# EAGLE board xr_vco_pots_V2 (EAGLE 7.3.0)
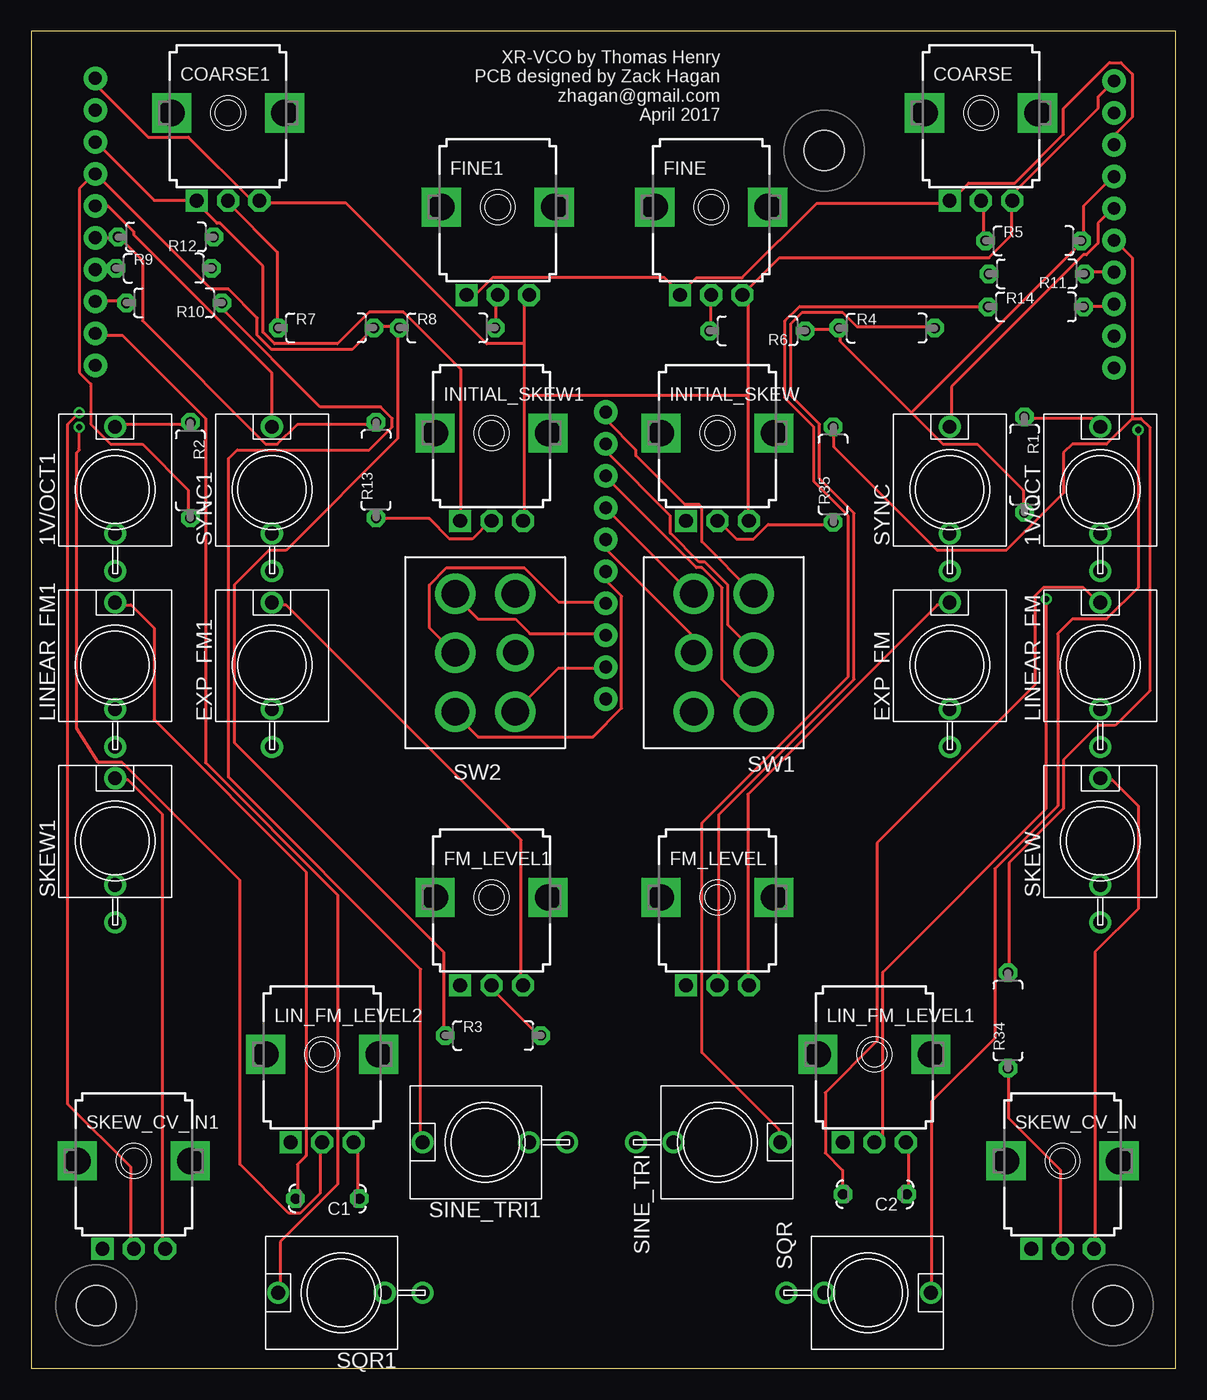
[diagram p0: board, top side]
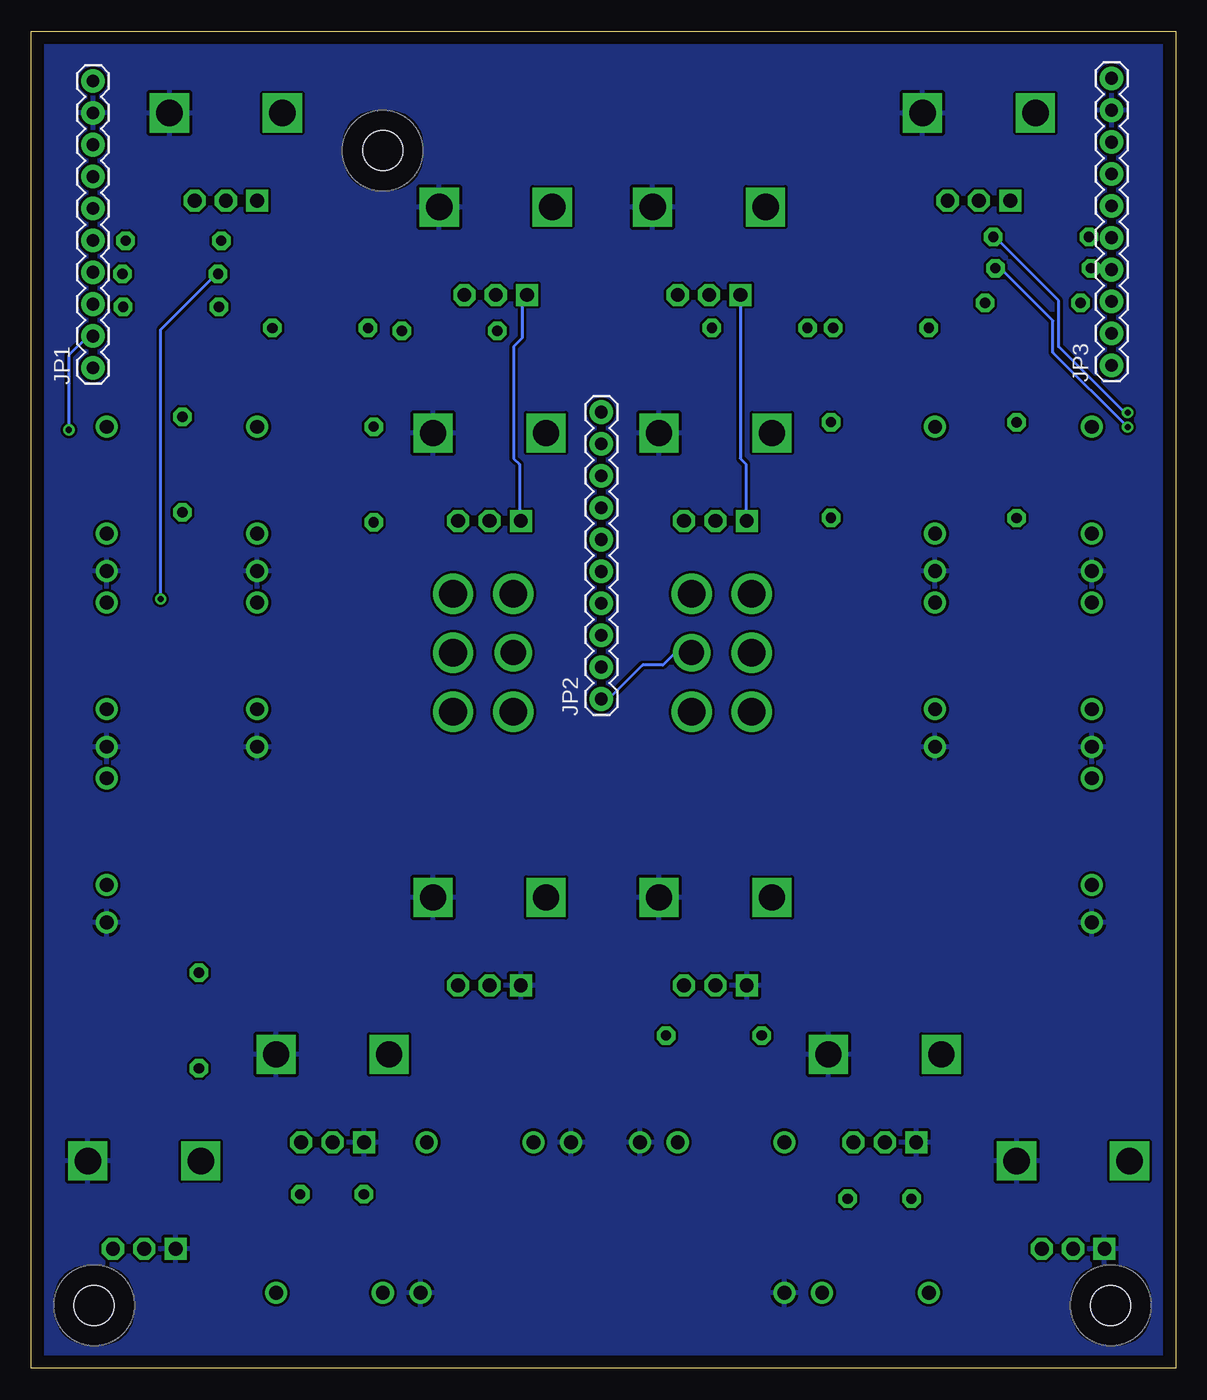
[diagram p1: board, bottom side, seen from below]

Size 91.17 x 106.5 mm. Coordinates in mm from the lower left corner, seen from the top.
Outline: 0,106.5 0,0 91.17,0 91.17,106.5 0,106.5
Copper layers (1*16): Top 0.035mm / dielectric 1.5mm / Bottom 0.035mm
Design rules "default *": minimum track width 10mil, minimum drill 19mil, track to track 8mil, track to pad 8mil, pad to pad 8mil, via to via 8mil, smd to smd 8mil, copper to edge 40mil, drill to drill 9mil, minimum pad ring 13mil, minimum via ring 8mil, stop-mask expansion 4mil, vias tented up to drill 0mil, thermal gap 10mil
Net classes: 1 power: width 0.406 mm; 2 ground: width 0.305 mm

## Footprints (pad centres in the part's own frame; a part is rotated, then mirrored left to right if it is on the bottom)
WQP-PJ301M-12_JACK = drill 1.1: P$1_TIP 0,5; P$2_SWITCH 0,-3.5; P$3_SLEEVE 0,-6.5
C050-024X044 = drill 0.813 octagon: 1 -2.54,0; 2 2.54,0
9MM_SNAP-IN_POT = drill 1.1 pad 1.676 square: 1 -2.5,-7 | drill 1.1 pad 1.676 octagon: 2 0,-7; 3 2.5,-7 | drill 2.1 pad 2.8 square: CHASSIS1 -4.5,0; CHASSIS2 4.5,0
1X10 = drill 1.016 pad 1.88: 1 0,0; 2 2.54,0; 3 5.08,0; 4 7.62,0; 5 10.16,0; 6 12.7,0; 7 15.24,0; 8 17.78,0; 9 20.32,0; 10 22.86,0
7MM_RESISTOR = drill 0.813 octagon: 1 -3.81,0; 2 3.81,0
DPDT = drill 2.2: A1 -2.4,4.7; A2 -2.4,0; A3 -2.4,-4.7; B1 2.4,4.7; B3 2.4,-4.7 | drill 2: B2 2.4,0
MOUNTING_HOLE = hole 3.2: 0,0

## Placement (x,y rotation side)
1V/OCT  THONKICONNNEW  [WQP-PJ301M-12_JACK]  85.17,70 0 top
1V/OCT1  THONKICONNNEW  [WQP-PJ301M-12_JACK]  6.67,70 0 top
C1  220nf  [C050-024X044]  23.59,13.5 180 top
C2  220nf  [C050-024X044]  67.21,13.85 180 top
COARSE  100k  [9MM_SNAP-IN_POT]  75.67,100 0 top
COARSE1  100k  [9MM_SNAP-IN_POT]  15.66,100 0 top
EXP_FM  THONKICONNNEW  [WQP-PJ301M-12_JACK]  73.17,56 0 top
EXP_FM1  THONKICONNNEW  [WQP-PJ301M-12_JACK]  19.16,56 0 top
FINE  100k  [9MM_SNAP-IN_POT]  54.16,92.5 0 top
FINE1  100k  [9MM_SNAP-IN_POT]  37.16,92.5 0 top
FM_LEVEL  100k  [9MM_SNAP-IN_POT]  54.66,37.5 0 top
FM_LEVEL1  100k  [9MM_SNAP-IN_POT]  36.66,37.5 0 top
INITIAL_SKEW  100k  [9MM_SNAP-IN_POT]  54.66,74.5 0 top
INITIAL_SKEW1  100k  [9MM_SNAP-IN_POT]  36.66,74.5 0 top
JP1  M10"  [1X10]  86.26,79.69 90 bottom
JP2  M10"  [1X10]  45.76,53.31 90 bottom
JP3  M10"  [1X10]  5.09,79.9 90 bottom
LIN_FM_LEVEL1  100k  [9MM_SNAP-IN_POT]  67.17,25 0 top
LIN_FM_LEVEL2  100k  [9MM_SNAP-IN_POT]  23.16,25 0 top
LINEAR_FM  THONKICONNNEW  [WQP-PJ301M-12_JACK]  85.17,56 0 top
LINEAR_FM1  THONKICONNNEW  [WQP-PJ301M-12_JACK]  6.67,56 0 top
R1  100k  [7MM_RESISTOR]  79.12,71.98 270 top
R2  100k  [7MM_RESISTOR]  12.66,71.53 270 top
R3  100k  [7MM_RESISTOR]  36.79,26.5 0 top
R4  100k  [7MM_RESISTOR]  68.15,82.86 0 top
R5  100k  [7MM_RESISTOR]  79.85,89.82 0 top
R6  2.4M  [7MM_RESISTOR]  57.84,82.64 180 top
R7  100k  [7MM_RESISTOR]  23.47,82.88 0 top
R8  2.4M  [7MM_RESISTOR]  33.13,82.88 0 top
R9  100k  [7MM_RESISTOR]  10.54,87.63 0 top
R10  1k  [7MM_RESISTOR]  11.38,84.87 180 top
R11  100k  [7MM_RESISTOR]  80.1,87.18 180 top
R12  100k  [7MM_RESISTOR]  10.71,90.12 180 top
R13  330k  [7MM_RESISTOR]  27.46,71.56 90 top
R14  1k  [7MM_RESISTOR]  80.04,84.56 0 top
R34  100k  [7MM_RESISTOR]  77.82,27.7 90 top
R35  330k  [7MM_RESISTOR]  63.89,71.19 90 top
SINE_TRI  THONKICONNNEW  [WQP-PJ301M-12_JACK]  54.66,18 270 top
SINE_TRI1  THONKICONNNEW  [WQP-PJ301M-12_JACK]  36.16,18 90 top
SKEW  THONKICONNNEW  [WQP-PJ301M-12_JACK]  85.17,42 0 top
SKEW1  THONKICONNNEW  [WQP-PJ301M-12_JACK]  6.67,42 0 top
SKEW_CV_IN  100k  [9MM_SNAP-IN_POT]  82.17,16.5 0 top
SKEW_CV_IN1  100k  [9MM_SNAP-IN_POT]  8.16,16.5 0 top
SQR  THONKICONNNEW  [WQP-PJ301M-12_JACK]  66.67,6 270 top
SQR1  THONKICONNNEW  [WQP-PJ301M-12_JACK]  24.66,6 90 top
SW1  DPDT  [DPDT]  55.16,57 180 top
SW2  DPDT  [DPDT]  36.16,57 0 top
SYNC  THONKICONNNEW  [WQP-PJ301M-12_JACK]  73.17,70 0 top
SYNC1  THONKICONNNEW  [WQP-PJ301M-12_JACK]  19.16,70 0 top
U$1  [MOUNTING_HOLE]  63.16,97 270 top
U$3  [MOUNTING_HOLE]  86.17,5 270 top
U$4  [MOUNTING_HOLE]  5.17,5 270 top

## Library data of the parts
1V/OCT 1V/OCT1 COARSE COARSE1 EXP_FM EXP_FM1 FINE FINE1 FM_LEVEL FM_LEVEL1 INITIAL_SKEW INITIAL_SKEW1 LIN_FM_LEVEL1 LIN_FM_LEVEL2 LINEAR_FM LINEAR_FM1 R1-R14 R34 R35 SINE_TRI SINE_TRI1 SKEW SKEW1 SKEW_CV_IN SKEW_CV_IN1 SQR SQR1 SYNC SYNC1 U$1 U$3 U$4 = MusicThingModular
C1 C2 = TomW
JP1-JP3 = SparkFun-Connectors
SW1 SW2 = gm-switches

## Nets
+12V: COARSE1.3 COARSE.3 FINE1.3 FINE.3 INITIAL_SKEW1.3 INITIAL_SKEW.3 JP1.10 JP3.10
-12V: COARSE1.1 COARSE.1 FINE1.1 FINE.1 INITIAL_SKEW1.1 INITIAL_SKEW.1 JP1.8 JP3.8
GND: 1V/OCT1.P$3_SLEEVE 1V/OCT.P$3_SLEEVE COARSE1.CHASSIS2 COARSE.CHASSIS2 EXP_FM1.P$3_SLEEVE EXP_FM.P$3_SLEEVE FINE1.CHASSIS2 FINE.CHASSIS2 FM_LEVEL1.1 FM_LEVEL1.CHASSIS2 FM_LEVEL.1 FM_LEVEL.CHASSIS2 INITIAL_SKEW1.CHASSIS2 INITIAL_SKEW.CHASSIS2 JP1.9 JP3.9 LIN_FM_LEVEL1.1 LIN_FM_LEVEL1.CHASSIS2 LIN_FM_LEVEL2.1 LIN_FM_LEVEL2.CHASSIS2 LINEAR_FM1.P$3_SLEEVE LINEAR_FM.P$3_SLEEVE SINE_TRI1.P$3_SLEEVE SINE_TRI.P$3_SLEEVE SKEW1.P$3_SLEEVE SKEW.P$3_SLEEVE SKEW_CV_IN1.1 SKEW_CV_IN1.CHASSIS2 SKEW_CV_IN.1 SKEW_CV_IN.CHASSIS2 SQR1.P$3_SLEEVE SQR.P$3_SLEEVE SYNC1.P$3_SLEEVE SYNC.P$3_SLEEVE
LIN_FM_CV_1: JP1.4 R11.1
LIN_FM_CV_2: JP3.4 R9.1
N$1: 1V/OCT.P$1_TIP R1.1
N$2: EXP_FM.P$1_TIP FM_LEVEL.3
N$3: FM_LEVEL.2 R4.2
N$4: COARSE.2 R5.1
N$5: FINE.2 R6.2
N$6: 1V/OCT1.P$1_TIP R2.1
N$7: EXP_FM1.P$1_TIP FM_LEVEL1.3
N$8: FM_LEVEL1.2 R3.2
N$9: COARSE1.2 R7.1
N$10: FINE1.2 R8.2
N$11: LIN_FM_LEVEL2.2 R9.2
N$12: C1.1 LIN_FM_LEVEL2.3
N$13: C1.2 LINEAR_FM1.P$1_TIP
N$14: R10.1 SINE_TRI1.P$1_TIP
N$15: SKEW1.P$1_TIP SKEW_CV_IN1.3
N$16: R12.1 SKEW_CV_IN1.2
N$17: LIN_FM_LEVEL1.2 R11.2
N$18: R14.1 SINE_TRI.P$1_TIP
N$19: C2.1 LIN_FM_LEVEL1.3
N$20: C2.2 LINEAR_FM.P$1_TIP
N$21: INITIAL_SKEW1.2 R13.1
N$42: SKEW.P$1_TIP SKEW_CV_IN.3
N$43: R34.1 SKEW_CV_IN.2
N$44: INITIAL_SKEW.2 R35.1
PITCH_CV_1: JP1.7 R1.2 R4.1 R5.2 R6.1
PITCH_CV_2: JP3.7 R2.2 R3.1 R7.2 R8.1
SINE_TRI_OUT_1: JP1.3 R14.2
SINE_TRI_OUT_2: JP3.3 R10.2
SKEW_IN_1: JP1.5 R34.2 R35.2
SKEW_IN_2: JP3.5 R12.2 R13.2
SQR_OUT_1: JP1.2 SQR.P$1_TIP
SQR_OUT_2: JP3.2 SQR1.P$1_TIP
SW_1_1: JP2.10 SW1.A3
SW_1_2: JP2.5 SW2.A3
SW_2_1: JP2.9 SW1.A2
SW_2_2: JP2.4 SW2.A2
SW_3_1: JP2.8 SW1.A1
SW_3_2: JP2.3 SW2.A1
SW_4_1: JP2.7 SW1.B3
SW_4_2: JP2.2 SW2.B3
SW_5_1: JP2.6 SW1.B2
SW_5_2: JP2.1 SW2.B2
SW_6: SW2.B1
SYNC_IN_1: JP1.6 SYNC.P$1_TIP
SYNC_IN_2: JP3.6 SYNC1.P$1_TIP

## Tracks (layer width: path | path; a pad name or v marks a point on that pad's centre or on a via)
+12V
  Top 0.254: JP3.10 5.19,102.64 5.19,102.18 9.31,98.07 12.51,98.07 17.54,93.04 18,93.04 COARSE1.3 18.22,92.81 25.08,92.81 36.28,81.61 39.26,81.61 | 39.26,81.61 39.26,85.27 39.48,85.5 FINE1.3 | 39.26,81.61 39.26,77.5 | 39.26,77.5 39.26,67.67 INITIAL_SKEW1.3 | JP1.10 86.12,102.41 84.98,101.27 84.98,100.36 78.35,93.73 78.35,93.04 COARSE.3 78.12,92.81 78.12,90.3 76.29,88.47 59.6,88.47 56.86,85.72 FINE.3 56.86,85.5 57.09,85.27 57.09,77.5 | 57.09,77.5 57.09,67.67 INITIAL_SKEW.3 | 57.09,77.5 39.26,77.5
-12V
  Top 0.254: JP3.8 5.19,97.61 9.77,93.04 12.97,93.04 COARSE1.1 13.19,92.81 14.79,91.21 15.02,91.21 18.45,87.78 18.45,82.53 19.37,81.61 24.4,81.61 26.91,84.12 29.65,84.12 34.23,79.55 34.23,67.67 INITIAL_SKEW1.1 | JP1.8 86.35,97.61 86.35,98.3 87.72,99.67 87.72,103.1 86.8,104.01 85.89,104.01 82.23,100.36 82.23,98.3 78.35,94.41 74.69,94.41 73.32,93.04 COARSE.1 73.09,92.81 62.57,92.81 56.63,86.87 52.97,86.87 51.83,85.72 FINE.1 51.6,85.72 50.46,86.87 36.74,86.87 35.6,85.72 34.68,85.72 FINE1.1
  Bottom 0.254: INITIAL_SKEW1.1 34.23,67.67 34.23,72.01 34.68,72.47 34.68,85.5 FINE1.1 | INITIAL_SKEW.1 52.29,67.67 52.29,72.01 52.74,72.47 52.74,81.38 52.06,82.07 52.06,85.27 51.83,85.5 FINE.1
GND
  pour Bottom: -1.56,108.56 -1.1,-0.64 92.48,-1.64 92.48,107.44
LIN_FM_CV_1
  Top 0.254: R11.1 84.06,87.33 86.12,87.33 JP1.4
LIN_FM_CV_2
  Top 0.254: R9.1 6.57,87.55 5.19,87.55 JP3.4
N$1
  Top 0.254: R1.1 79.26,75.67 84.52,75.67 84.98,75.21 1V/OCT.P$1_TIP
N$2
  Top 0.254: FM_LEVEL.3 57.09,30.63 57.09,45.72 72.17,60.81 73.09,60.81 EXP_FM.P$1_TIP
N$3
  Top 0.254: R4.2 71.95,82.98 65.77,82.98 64.63,84.12 61.43,84.12 60.52,83.21 60.52,77.5 62.8,75.21 62.8,70.87 65.55,68.12 65.55,54.86 54.8,44.12 54.8,30.63 FM_LEVEL.2
N$4
  Top 0.254: R5.1 75.83,89.84 75.83,92.81 COARSE.2
N$5
  Top 0.254: R6.2 54.12,82.75 54.12,85.5 FINE.2
N$6
  Top 0.254: R2.1 12.51,75.21 6.79,75.21 1V/OCT1.P$1_TIP
N$7
  Top 0.254: EXP_FM1.P$1_TIP 19.37,60.81 20.28,60.81 39.03,42.06 39.03,30.63 FM_LEVEL1.3
N$8
  Top 0.254: R3.2 40.4,26.52 36.51,30.4 FM_LEVEL1.2
N$9
  Top 0.254: R7.1 19.6,82.98 19.6,88.92 15.71,92.81 COARSE1.2
N$10
  Top 0.254: R8.2 36.97,82.98 36.97,85.5 FINE1.2
N$11  (via drill 0.48)
  Top 0.254: v3.82,74.98 3.82,73.15 3.59,72.92 3.59,50.98 5.34,48.23 7.25,48.23 16.62,38.86 16.62,16.23 20.51,12.34 21.43,12.34 23.02,13.95 23.02,17.83 LIN_FM_LEVEL2.2
  Bottom 0.254: v3.82,74.98 9.77,80.92 9.77,83.44 13.88,87.55 14.34,87.55 R9.2
N$12
  Top 0.254: C1.1 26,13.72 26,17.6 25.77,17.83 LIN_FM_LEVEL2.3
N$13
  Top 0.254: C1.2 21.2,13.72 21.2,16.23 21.88,16.92 21.88,39.55 9.77,51.66 9.77,58.98 7.94,60.81 7.02,60.81 LINEAR_FM1.P$1_TIP
N$14
  Top 0.254: R10.1 15.25,84.81 15.25,84.35 23.02,76.58 27.83,76.58 28.74,75.67 28.74,74.98 26.91,73.15 16.4,73.15 15.71,72.47 15.71,47.09 31.03,31.77 31.03,18.06 SINE_TRI1.P$1_TIP
N$15
  Top 0.254: SKEW1.P$1_TIP 6.79,46.86 7.71,46.86 10.45,44.12 10.45,9.6 SKEW_CV_IN1.3
N$16  (via drill 0.48)
  Top 0.254: v3.82,76.12 2.91,75.21 2.91,21.03 7.94,16 7.94,9.6 SKEW_CV_IN1.2
  Bottom 0.254: v3.82,76.12 4.05,76.12 9.31,81.38 9.31,85.04 14.34,90.07 R12.1
N$17  (via drill 0.48)
  Top 0.254: v80.86,61.27 80.86,44.58 67.83,31.55 67.83,18.52 67.37,18.06 LIN_FM_LEVEL1.2
  Bottom 0.254: v80.86,61.27 80.86,82.75 76.52,87.1 R11.2
N$18
  Top 0.254: R14.1 76.06,84.58 61.2,84.58 60.06,83.44 60.06,77.27 62.34,74.98 62.34,70.64 65.09,67.89 65.09,55.09 53.43,43.43 53.43,25.15 59.6,18.97 59.6,18.06 SINE_TRI.P$1_TIP
N$19
  Top 0.254: C2.1 69.89,13.95 69.89,17.83 LIN_FM_LEVEL1.3
N$20
  Top 0.254: C2.2 64.63,13.95 64.63,15.77 63.26,17.14 63.26,21.95 67.37,26.06 67.37,41.83 79.95,54.41 79.95,61.49 80.63,62.18 83.83,62.18 84.98,61.04 LINEAR_FM.P$1_TIP
N$21
  Top 0.254: R13.1 27.6,67.67 31.71,67.67 33.31,66.06 35.14,66.06 36.51,67.44 INITIAL_SKEW1.2
N$42
  Top 0.254: SKEW_CV_IN.3 84.75,9.6 84.75,33.15 88.18,36.58 88.18,44.81 86.12,46.86 85.2,46.86 SKEW.P$1_TIP
N$43
  Top 0.254: R34.1 77.89,23.77 77.89,19.89 82,15.77 82,9.6 SKEW_CV_IN.2
N$44
  Top 0.254: R35.1 63.72,67.21 58.69,67.21 57.54,66.06 56.17,66.06 54.8,67.44 INITIAL_SKEW.2
PITCH_CV_1
  Top 0.254: JP1.7 86.12,94.87 83.83,92.58 83.83,89.84 R5.2 83.6,89.61 70.12,76.12 | R6.1 61.66,82.75 64.17,82.75 R4.1 64.4,82.75 64.4,81.84 70.12,76.12 | 70.12,76.12 72.63,73.61 75.37,73.61 79.03,69.95 79.03,68.35 R1.2
PITCH_CV_2
  Top 0.254: R2.2 12.51,67.89 12.51,69.95 8.85,73.61 6.34,73.61 4.74,75.21 4.74,78.41 3.82,79.32 3.82,93.95 4.97,95.1 JP3.7 5.19,95.1 14.34,85.95 15.71,85.95 18,83.67 18,82.3 19.14,81.15 25.54,81.15 27.14,82.75 R7.2 27.37,82.98 29.2,82.98 R8.1 29.2,82.75 29.2,74.07 20.28,65.15 18.91,65.15 16.17,62.41 16.17,49.84 32.85,33.15 32.85,26.52 R3.1
SINE_TRI_OUT_1
  Top 0.254: R14.2 84.06,84.58 86.12,84.58 JP1.3
SINE_TRI_OUT_2
  Top 0.254: R10.2 7.48,85.04 5.19,85.04 JP3.3
SKEW_IN_1
  Top 0.254: 87.72,75.67 85.66,73.61 82.92,73.61 82.23,72.92 82.23,69.72 77.66,65.15 72.17,65.15 63.94,73.38 63.94,74.98 R35.2 | 87.72,75.67 87.72,88.47 86.35,89.84 JP1.5 | 87.72,75.67 88.41,75.67 89.09,74.98 89.09,53.95 86.35,51.21 84.98,51.21 82.23,48.46 82.23,44.58 77.89,40.23 77.89,31.55 R34.2
SKEW_IN_2
  Top 0.254: JP3.5 5.19,90.07 6.79,90.07 R12.2 7.02,90.07 8.85,88.24 8.85,83.44 18.68,73.61 19.6,73.61 21.2,75.21 27.37,75.21 R13.2
SQR_OUT_1  (via drill 0.48)
  Top 0.254: v88.18,74.75 88.18,62.18 85.66,59.66 82.92,59.66 81.78,58.52 81.78,44.81 76.75,39.78 76.75,26.29 71.72,21.26 71.72,6.17 SQR.P$1_TIP
  Bottom 0.254: v88.18,74.75 88.18,80.7 86.8,82.07 86.35,82.07 JP1.2
SQR_OUT_2
  Top 0.254: SQR1.P$1_TIP 19.82,6.17 19.82,10.06 24.4,14.63 24.4,37.72 13.88,48.23 13.88,75.67 7.25,82.3 5.19,82.3 JP3.2
SW_1_1
  Top 0.254: JP2.10 45.88,76.12 45.88,75.44 48.17,73.15 48.17,72.69 52.06,68.81 53.2,68.81 53.43,68.58 53.43,65.84 57.54,61.72 SW1.A3
SW_1_2
  Top 0.254: JP2.5 45.88,63.32 45.88,62.64 47.03,61.49 47.03,52.58 44.74,50.29 35.6,50.29 33.77,52.12 SW2.A3
SW_2_1
  Top 0.254: JP2.9 45.88,73.61 45.88,72.92 50.91,67.89 50.91,66.52 53.2,64.24 53.66,64.24 55.49,62.41 55.49,59.21 57.54,57.15 SW1.A2
SW_2_2
  Top 0.254: JP2.4 45.66,61.04 42,61.04 39.26,63.78 33.08,63.78 31.71,62.41 31.71,58.98 33.54,57.15 SW2.A2
SW_3_1
  Top 0.254: JP2.8 45.88,70.87 52.97,63.78 53.43,63.78 55.03,62.18 55.03,54.86 57.54,52.35 SW1.A1
SW_3_2
  Top 0.254: JP2.3 45.66,58.52 39.71,58.52 38.57,59.66 35.6,59.66 33.77,61.49 SW2.A1
SW_4_1
  Top 0.254: JP2.7 45.88,68.35 52.74,61.49 SW1.B3
SW_4_2
  Top 0.254: JP2.2 45.66,55.78 42,55.78 38.57,52.35 SW2.B3
SW_5_1
  Top 0.254: JP2.6 45.88,65.84 45.88,65.15 52.74,58.29 52.74,57.15 SW1.B2
SW_5_2
  Bottom 0.254: JP2.1 45.66,53.49 44.97,53.49 42.46,56.01 40.86,56.01 39.94,56.92 38.57,56.92 SW2.B2
SYNC_IN_1
  Top 0.254: SYNC.P$1_TIP 73.32,75.21 73.32,78.18 83.83,88.7 84.06,88.7 84.98,89.61 84.98,91.21 86.12,92.35 JP1.6
SYNC_IN_2
  Top 0.254: SYNC1.P$1_TIP 19.14,75.21 19.14,79.32 8.17,90.3 8.17,90.53 6.11,92.58 5.19,92.58 JP3.6

## Text on the board
tNames: XR-VCO by Thomas Henry / PCB designed by Zack Hagan / zhagan@gmail.com / April 2017